# Altium PCB ESP unit.PcbDoc (part 1 of 2)
Units mil, origin at the board's own origin, x right, y up, seen from the top; angles counter-clockwise.
Board outline 2203 x 1101 mil, 2 copper layers (Top Layer, Bottom Layer); 42 components, 65 nets, 171 pads, 86 vias.
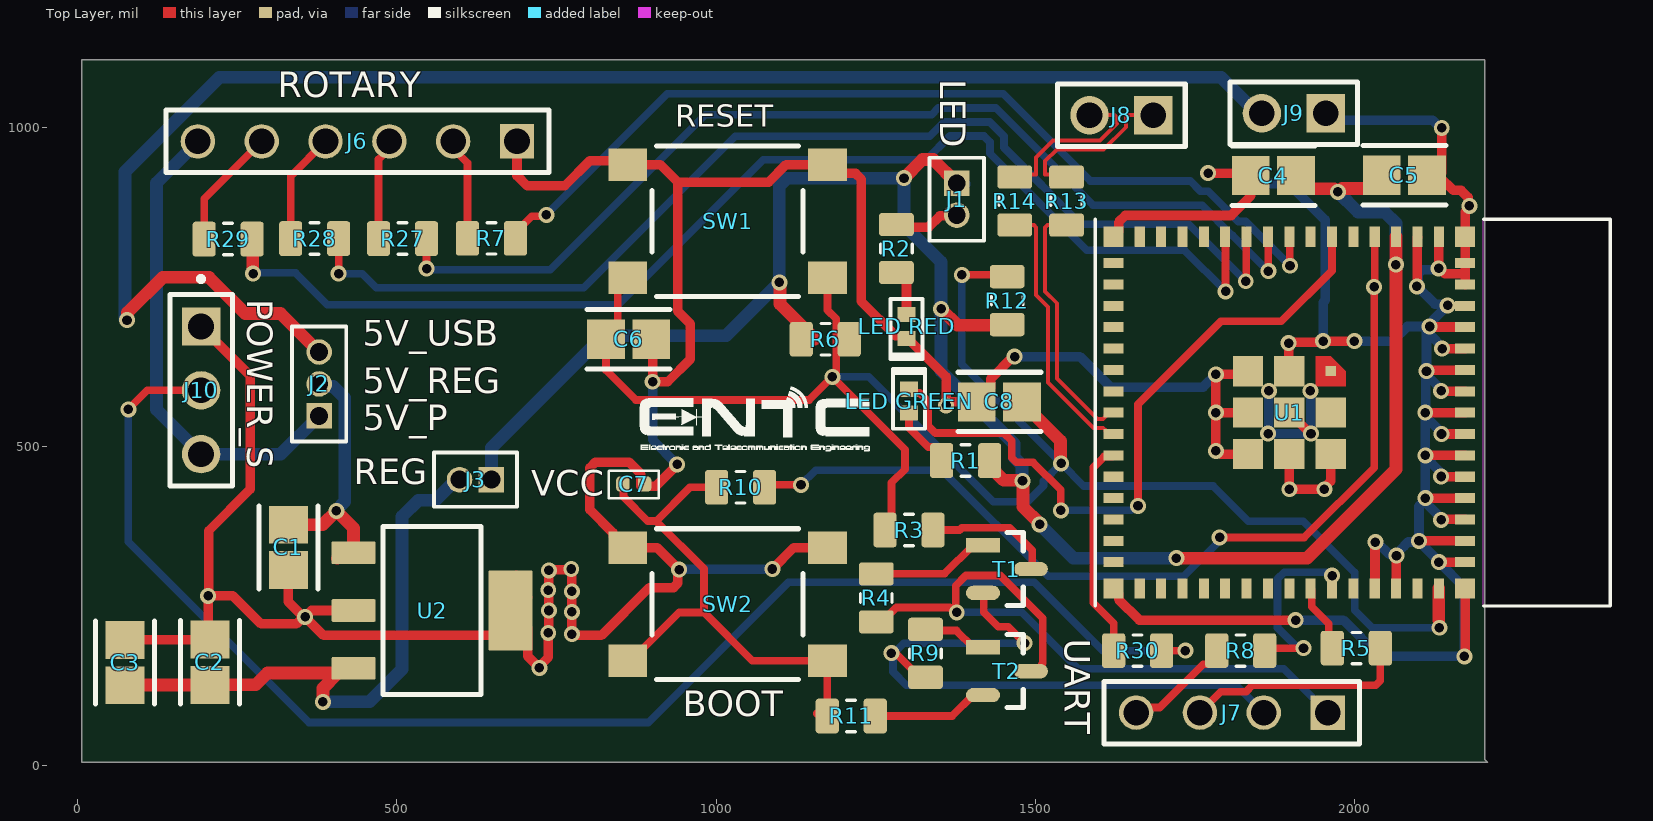
[diagram p0: Top Layer view]
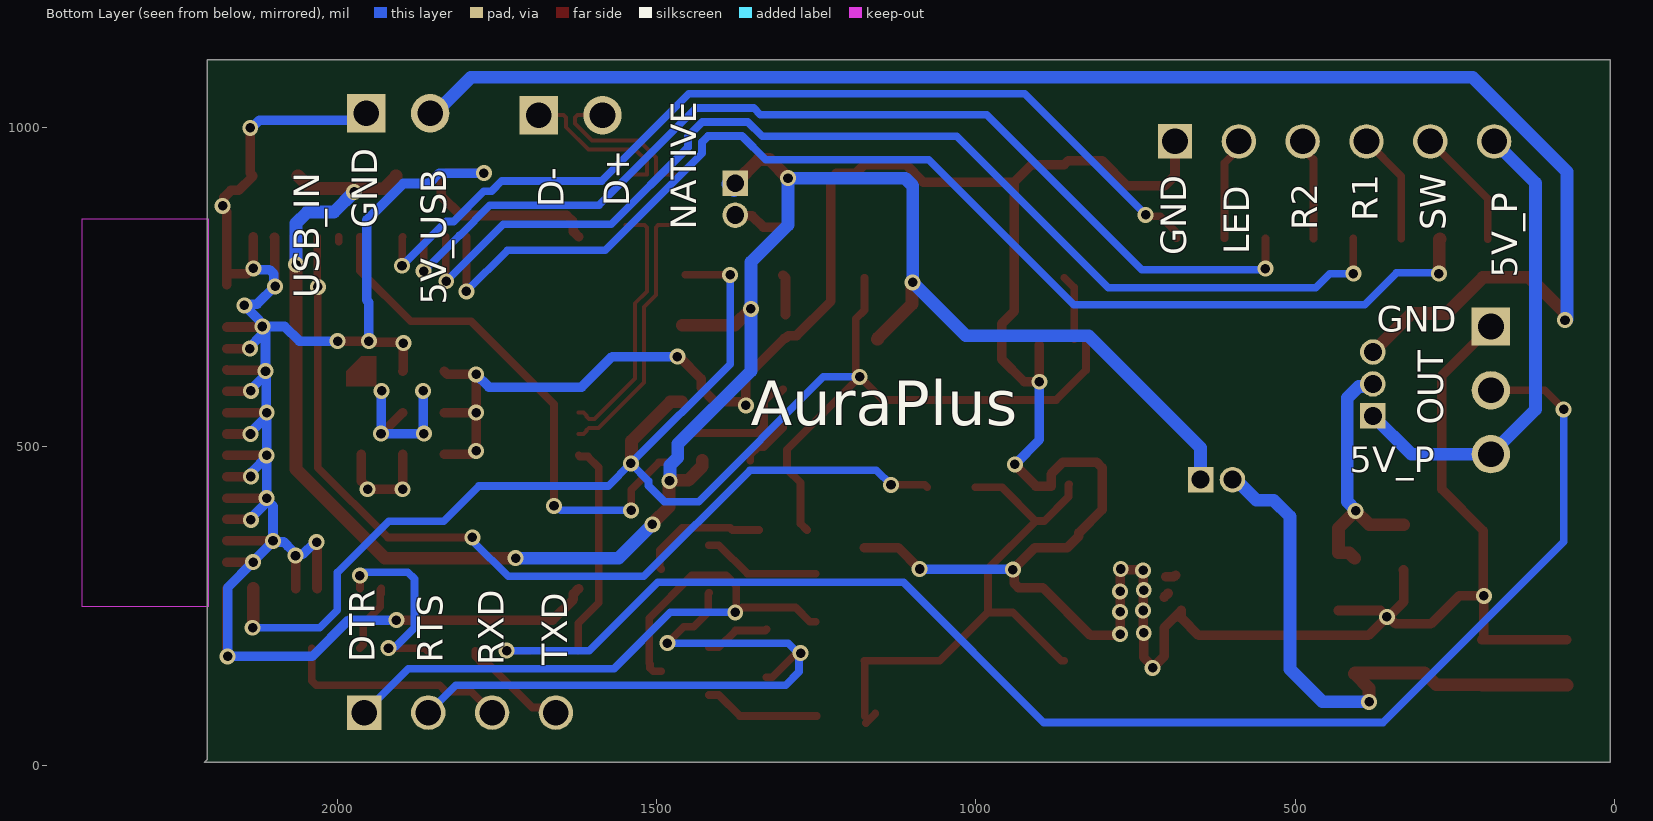
[diagram p1: Bottom Layer view, seen from below]
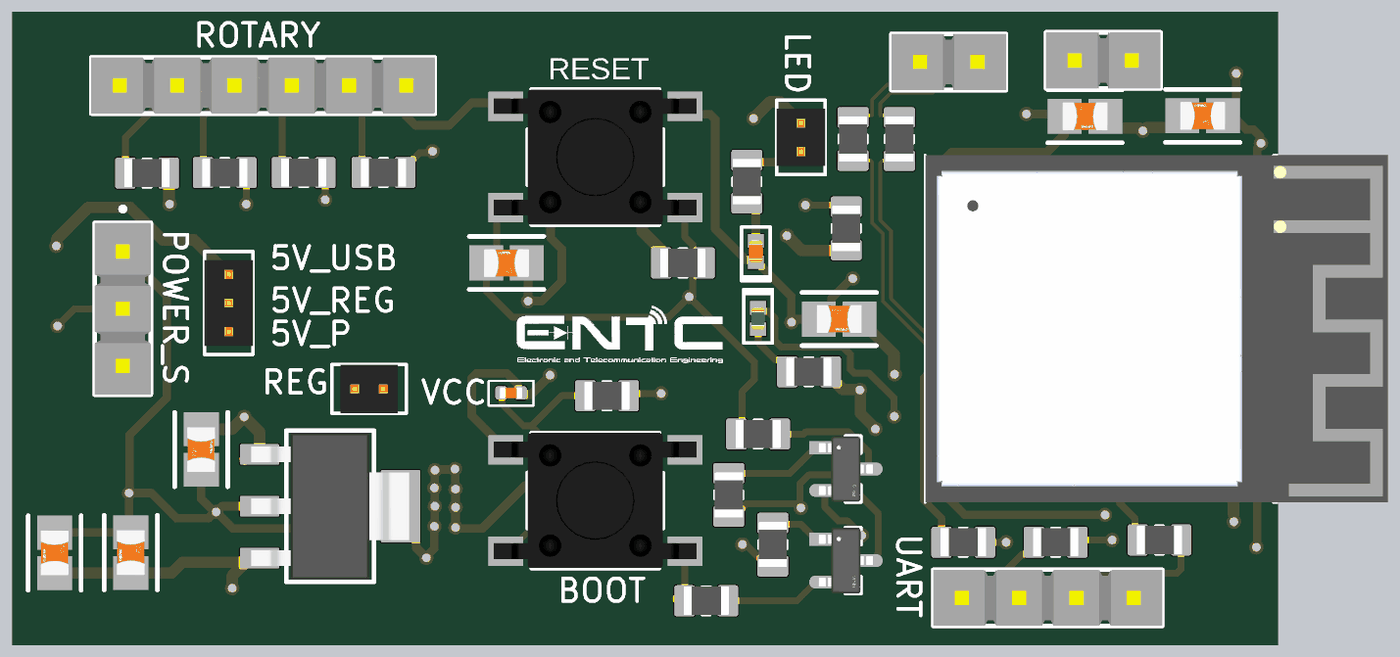
[diagram p2: 3D render of the assembled board from above, using the file's embedded part models]

## Layer stack, top to bottom
Top Solder: solder mask 0.4, Solder Resist, Dk 3.5
Top Layer: signal copper 1.4
Dielectric 1: dielectric 12.6, FR-4, Dk 4.8
Bottom Layer: signal copper 1.4
Bottom Solder: solder mask 0.4, Solder Resist, Dk 3.5

## Board outline
6,5 2209,5 2204,10 2204,1106 6,1106

## Design rules (kind name [scope] priority, off if disabled: settings)
AssemblyTestPointUsage [All] p1: isadvanced=TRUE
AssemblyTestpoint [All] p1: isadvanced=TRUE testpointundercomponent=TRUE minsize=40 maxsize=100 preferedsize=60 minholesize=0 maxholesize=40 preferedholesize=32 testpointgrid=1 usegrid=TRUE gridtolerance=0.01 allowsidetop=TRUE allowsidebottom=TRUE
Clearance "DIFF90 Clearence" [All] p1: isadvanced=TRUE gap=8 ignorepadtopadclearanceinfootprint=FALSE
Clearance Clearance_1 [OnMid vs OnMid] p2: gap=10 ignorepadtopadclearanceinfootprint=FALSE sourcerule=47 cellrowname=All cellrowtype=0 cellcolname=All cellcoltype=0 innerlayers=TRUE
Clearance Clearance_2 [(ExistsOnLayer('Top Layer') Or ExistsOnLayer('Bottom Layer')) vs (ExistsOnLayer('Top Layer') Or ExistsOnLayer('Bottom Layer'))] p3: gap=10 ignorepadtopadclearanceinfootprint=FALSE sourcerule=47 cellrowname=All cellrowtype=0 cellcolname=All cellcoltype=0 outerlayers=TRUE
Clearance [All] p4: gap=10 ignorepadtopadclearanceinfootprint=FALSE ismatrix=TRUE
ComponentClearance [All] p1: isadvanced=TRUE gap=10 collisioncheckmode=3 verticalgap=10 showdistances=FALSE
DiffPairsRouting DIFF90 [All] p1: isadvanced=TRUE maxlimit=8.1 minlimit=8 mostfreqgap=8 toplayer_minwidth=6.03 toplayer_maxwidth=6.23 toplayer_prefwidth=6.03 bottomlayer_minwidth=6.03 bottomlayer_maxwidth=6.23 bottomlayer_prefwidth=6.03 maxuncoupledlength=10
DiffPairsRouting [All] p2: maxlimit=10 minlimit=10 mostfreqgap=10 toplayer_minwidth=15 toplayer_maxwidth=15 toplayer_prefwidth=15 bottomlayer_minwidth=15 bottomlayer_maxwidth=15 bottomlayer_prefwidth=15 maxuncoupledlength=500
FabricationTestPointUsage [All] p1: isadvanced=TRUE valid=0 allowmultiple=FALSE
FabricationTestpoint [All] p1: isadvanced=TRUE side=3 testpointundercomponent=TRUE minsize=40 maxsize=100 preferedsize=60 minholesize=0 maxholesize=40 preferedholesize=32 testpointgrid=1 allowsidetop=TRUE allowsidebottom=TRUE usegrid=TRUE gridtolerance=0.01
FanoutControl Fanout_BGA [IsBGA] p1: isadvanced=TRUE bgadir=Out bgaviamode=Centered fanoutstyle=Auto fanoutdirection=Alternating viagrid=1 // Fanout_BGA (Default Rule)
FanoutControl Fanout_LCC [IsLCC] p2: isadvanced=TRUE bgadir=Out bgaviamode=Centered fanoutstyle=Auto fanoutdirection=Alternating viagrid=1 // Fanout_LCC (Default Rule)
FanoutControl Fanout_SOIC [IsSOIC] p3: isadvanced=TRUE bgadir=Out bgaviamode=Centered fanoutstyle=Auto fanoutdirection=Alternating viagrid=1 // Fanout_SOIC (Default Rule)
FanoutControl Fanout_Small [(CompPinCount < 5)] p4: isadvanced=TRUE bgadir=Out bgaviamode=Centered fanoutstyle=Auto fanoutdirection=OutThenIn viagrid=1 // Fanout_Small (Default Rule)
FanoutControl Fanout_Default [All] p5: isadvanced=TRUE bgadir=Out bgaviamode=Centered fanoutstyle=Auto fanoutdirection=Alternating viagrid=1 // Fanout_Default (Default Rule)
Height [All] p1: isadvanced=TRUE minheight=0 maxheight=1000 prefheight=500
HoleSize [All] p1: isadvanced=TRUE absolutevalues=TRUE maxlimit=100 minlimit=1 maxpercent=80.000 minpercent=20.000
HoleToHoleClearance [All] p1: isadvanced=TRUE gap=10 allowstackedmicrovias=TRUE
LayerPairs [All] p1: isadvanced=TRUE enforce=TRUE
MinimumSolderMaskSliver [All] p1: isadvanced=TRUE minsoldermaskwidth=3.94
NetAntennae [All] p1: isadvanced=TRUE netantennaetolerance=0
PasteMaskExpansion [All] p1: isadvanced=TRUE expansion=0
PlaneClearance [All] p1: isadvanced=TRUE clearance=20
PlaneConnect [All] p1: isadvanced=TRUE planeconnectstyle=Relief reliefexpansion=20 reliefentries=4 reliefconductorwidth=10 reliefairgap=10
PolygonConnect [All] p1: connectstyle=Relief reliefconductorwidth=10 reliefentries=4 polygonreliefangle="90 Angle" airgapwidth=10
RoutingCorners [All] p1: isadvanced=TRUE cornerstyle=45-Degree minsetback=100 maxsetback=100
RoutingPriority [All] p1: isadvanced=TRUE routingpriority=0
RoutingVias [All] p1: isadvanced=TRUE holewidth=12 width=24 viastyle="Through Hole" minholewidth=12 minwidth=24 maxholewidth=12 maxwidth=24
RoutingVias RoutingViaStyle_1 [All] p2: holewidth=10 width=15 viastyle="Through Hole" minholewidth=12 minwidth=20 maxholewidth=2000 maxwidth=3000
ShortCircuit [All] p1: isadvanced=TRUE allowed=FALSE
SilkToSilkClearance [All] p1: isadvanced=TRUE silktosilkclearance=10
SilkToSolderMaskClearance [IsPad] p1: isadvanced=TRUE minsilkscreentomaskgap=6 clearancetoexposedcopper=TRUE
SolderMaskExpansion SolderMaskExpansion_1 [All] p1: isadvanced=TRUE expansion=2 istentingtop=FALSE useseparateexpansions=TRUE expansionbottom=2 istentingbottom=FALSE
SolderMaskExpansion [All] p2: isadvanced=TRUE expansion=4 istentingtop=FALSE
SupplyNets "Schematic Supply Nets_5" [InNet('+VCC_3V3')] p1: isadvanced=TRUE voltage=0.000
SupplyNets "Schematic Supply Nets_4" [InNet('5V_IN')] p2: isadvanced=TRUE voltage=0.000
SupplyNets "Schematic Supply Nets_3" [InNet('3V3_REG')] p3: isadvanced=TRUE voltage=0.000
SupplyNets "Schematic Supply Nets_2" [InNet('GND')] p4: isadvanced=TRUE voltage=0.000
SupplyNets "Schematic Supply Nets_1" [InNet('5V_USB')] p5: isadvanced=TRUE voltage=0.000
SupplyNets "Schematic Supply Nets" [InNet('5V_REG')] p6: isadvanced=TRUE voltage=0.000
UnRoutedNet [All] p1: isadvanced=TRUE
UnpouredPolygon [All] p1: isadvanced=TRUE
Width [All] p1: isadvanced=TRUE maxlimit=100 minlimit=10 preferedwidth=10 minimp=50.000000 maximp=50.000000 favimp=50.000000
Width MaxMinWidth_1 [All] p2: maxlimit=50 minlimit=10 preferedwidth=15 minimp=50.000000 maximp=50.000000 favimp=50.000000
3 further rules are at their usual default settings.

## Classes and differential pairs
differential pair NewDifferentialPair1: +GPIO_P -GPIO_N
differential pair DIFF90: +GPIO_D_P -GPIO_D_N

## Components (designator, comment, footprint, x,y, rotation, side; value= is the part's Value field where it differs from the comment)
C1 "4u7 New" FP-CC0805-0_85-IPC_A 330,342 r90 top value=4.7uF
C2 "10uF New" FP-CC0805-0_85-IPC_A 207,162 r270 top value=10uF
C3 "10uF New" FP-CC0805-0_85-IPC_A 74,161.46 r270 top value=10uF
C4 "10uF New" FP-CC0805-0_85-IPC_A 1873.11,924.26 r0 top value=10uF
C5 "100nF New" FP-CC0805-0_85-IPC_A 2078.46,925 r180 top value=100nF
C6 "1uF New" FP-CC0805-0_85-IPC_A 863,668 r180 top value=1uF
C7 "100nF, 50V" CAPC1005X55N 870.93,441 r180 top
C8 "1uF New" FP-CC0805-0_85-IPC_A 1443.91,569.93 r0 top value=1uF
J1 "FTS-102-01-F-S" "2 PIN CONNECTOR JUMPER" 1377.02,912.45 r0 top
J2 "FTS-103-01-F-S" "3 PIN CONNECTOR JUMPER - DUPLICATE" 378,548 r180 top
J3 "FTS-102-01-F-S" "2 PIN CONNECTOR JUMPER" 648,448 r270 top
J6 "6 Pin Connector" SAMTEC_HTSW-106-07-G-S 438,978 r0 top
J7 "4 Pin Connector" SAMTEC_HTSW-104-07-G-S 1808,83 r0 top
J8 "2 Pin Connector" SAMTEC_HTSW-102-07-G-S 1635,1019 r0 top
J9 "2 Pin Connector" SAMTEC_HTSW-102-07-G-S 1905,1022 r0 top
J10 "3 Pin Connector" SAMTEC_HTSW-103-XX-X-S 193,588 r90 top
"LED GREEN" "GREEN" "LED 0402G" 1302.21,570.91 r270 top
"LED RED" "RED" "LED 0402R" 1298.28,688.04 r90 top
R1 "1K New" RESC2012X60N 1390.99,478 r0 top value=1kR
R2 "1K New" RESC2012X60N 1282.53,810.09 r90 top value=1kR
R3 "0 Ohm New" RESC2012X60N 1302.21,369.14 r180 top value=0R
R4 "10K New" RESC2012X60N 1251.03,262.84 r90 top value=10kR
R5 "0 Ohm New" RESC2012X60N 2003,184.1 r0 top value=0R
R6 "10K New" RESC2012X60N 1170.99,668 r180 top value=10kR
R7 "0 Ohm New" RESC2012X60N 648,826 r0 top value=0R
R8 "0 Ohm New" RESC2012X60N 1821.9,180.17 r180 top value=0R
R9 "10K New" RESC2012X60N 1328,175.99 r90 top value=10kR
R10 "27 ohms New" RESC2012X60N 1038.43,436.07 r0 top value=27R
R11 "0 Ohm New" RESC2012X60N 1211.66,77.8 r180 top value=0R
R12 "10K New" RESC2012X60N 1456,728.4 r270 top value=10kR
R13 "0 Ohm New" RESC2012X60N 1549,884.4 r270 top value=0R
R14 "0 Ohm New" RESC2012X60N 1468,884.6 r270 top value=0R
R27 "0 Ohm New" RESC2012X60N 508.71,825.83 r0 top value=0R
R28 "0 Ohm New" RESC2012X60N 370.91,825.83 r0 top value=0R
R29 "0 Ohm New" RESC2012X60N 235.41,825 r0 top value=0R
R30 "0 Ohm New" RESC2012X60N 1660.48,180.17 r0 top value=0R
SW1 "PTS645SH50SMTR92 LFS" FP-PTS645SH50SMTR92LFS-MFG 1018,853 r180 top
SW2 "PTS645SH50SMTR92 LFS" FP-PTS645SH50SMTR92LFS-MFG 1018,253 r180 top
T1 "SS8050-G" FP-SS8050-G-IPC_B 1455.58,308 r0 top
T2 "SS8050-G" FP-SS8050-G-IPC_B 1455.58,148 r0 top
U1 "ESP32-S3-MINI-1-N8" XCVR_ESP32-S3-MINI-1-N8 1898,553 r270 top
U2 "TL1963A-33DCYR" DCY0004A_N 555,243 r0 top

## Footprints (in the part's own frame and the unit in brackets; to place one, negate y for a bottom-side part, rotate by r counter-clockwise, add the part's x,y. Pads: shape width x height; smd on the part's side, far side on the other; paste and mask are expansions set on the pad)
"2 PIN CONNECTOR JUMPER" [mil]
  rect 40x40 hole 28: 1(0,0)
  round 40 hole 28: 2(0,-50)
  silkscreen extent -42,-90 42,40, body extent -42,-75 42,25, height 154
"3 PIN CONNECTOR JUMPER - DUPLICATE" [mil]
  rect 40x40 hole 28: 1(0,0)
  round 40 hole 28: 2(0,-50) 3(0,-100)
  silkscreen extent -43,-140 43,40, body extent -42,-125 43,25, height 154
CAPC1005X55N [mm]
  rrect53% 0.54x0.6 smd: 1(-0.43,0) 2(0.43,0)
  silkscreen extent -0.99,-0.53 0.99,0.56, body extent -0.5,-0.25 0.5,0.25, height 0.55
DCY0004A_N [mm] "SOT223, 4-Leads, Body 6.7x3.7mm, Pitch 2.3mm, IPC Medium Density"
  rrect11% 1.75x0.9 smd: 1(-3.125,2.3) 2(-3.125,0) 3(-3.125,-2.3)
  rrect6% 1.75x3.2 smd: 4(3.125,0)
  silkscreen extent -1.95,-3.35 1.95,3.35, body extent -3.5,-3.25 3.5,3.25, height 1.62
FP-CC0805-0_85-IPC_A [mil]
  rect 59.24x61.27 smd paste+0 mask+0: 1(-35.46,0) 2(35.46,0)
  silkscreen extent -65,-46 65,46, body extent -85,-50 85,50, height 10
FP-PTS645SH50SMTR92LFS-MFG [mm]
  rect 1.55x1.3 smd paste+0 mask+0: 1(-3.975,2.25) 2(3.975,2.25) 3(-3.975,-2.25) 4(3.975,-2.25)
  silkscreen extent -3,-3 3,3, body extent -4.5,-3 4.5,3, height 4.3
FP-SS8050-G-IPC_B [mm]
  rect 1.357x0.572 smd paste+0 mask+0: 1(-0.951,0.95)
  rrect100% 1.357x0.572 smd paste+0 mask+0: 2(-0.951,-0.95) 3(0.951,0)
  silkscreen extent 0,-1.45 0.65,1.45, body extent -1.88,-1.7 1.88,1.7, height 0.25
"LED 0402G" [mm]
  rect 0.6x0.7 smd: 1(-0.475,0) 2(0.475,0)
  silkscreen extent -1.3,-0.64 1.09,0.64, body extent -0.5,-0.3 0.5,0.3, height 0.2
"LED 0402R" [mm]
  rect 0.6x0.7 smd: 1(-0.475,0) 2(0.475,0)
  silkscreen extent -1.3,-0.64 1.09,0.64, body extent -0.5,-0.3 0.5,0.3, height 0.2
RESC2012X60N [mm]
  rrect25% 0.92x1.38 smd: 1(-0.955,0) 2(0.955,0)
  silkscreen extent -0.18,-0.63 0.18,0.63, body extent -1,-0.63 1,0.63, height 0.3
SAMTEC_HTSW-102-07-G-S [mm]
  rect 1.53x1.53 hole 1.02: 1(1.27,0)
  round 1.53 hole 1.02: 2(-1.27,0)
  silkscreen extent -2.54,-1.24 2.54,1.24, body extent -2.54,-1.24 2.54,1.24, height 8.38
SAMTEC_HTSW-103-XX-X-S [mm]
  rect 1.53x1.53 / inner round 1.53 / far side rect 1.53x1.53 hole 1.02: 1(2.54,0)
  round 1.53 hole 1.02: 2(0,0) 3(-2.54,0)
  silkscreen extent -3.81,-1.24 4.53,1.24, body extent -3.81,-1.24 3.81,1.24, height 8.38
SAMTEC_HTSW-104-07-G-S [mm]
  rect 1.37x1.37 / inner round 1.37 / far side rect 1.37x1.37 hole 1.02: 1(3.81,0)
  round 1.37 hole 1.02: 2(1.27,0) 3(-1.27,0) 4(-3.81,0)
  silkscreen extent -5.08,-1.24 5.08,1.24, body extent -5.08,-1.24 5.08,1.24, height 8.38
SAMTEC_HTSW-106-07-G-S [mm]
  rect 1.37x1.37 / inner round 1.37 / far side rect 1.37x1.37 hole 1.02: 1(6.35,0)
  round 1.37 hole 1.02: 2(3.81,0) 3(1.27,0) 4(-1.27,0) 5(-3.81,0) 6(-6.35,0)
  silkscreen extent -7.62,-1.24 7.62,1.24, body extent -7.62,-1.24 7.62,1.24, height 8.38
XCVR_ESP32-S3-MINI-1-N8 [mm]
  rect 0.8x0.4 smd: 1(-7,5.95) 2(-7,5.1) 3(-7,4.25) 4(-7,3.4) 5(-7,2.55) 6(-7,1.7) 7(-7,0.85) 8(-7,0) 9(-7,-0.85) 10(-7,-1.7) 11(-7,-2.55) 12(-7,-3.4) 13(-7,-4.25) 14(-7,-5.1) 15(-7,-5.95) 31(7,-5.95) 32(7,-5.1) 33(7,-4.25) 34(7,-3.4) 35(7,-2.55) 36(7,-1.7) 37(7,-0.85) 38(7,0) 39(7,0.85) 40(7,1.7) 41(7,2.55) 42(7,3.4) 43(7,4.25) 44(7,5.1) 45(7,5.95)
  rect 0.4x0.8 smd: 16(-5.95,-7) 17(-5.1,-7) 18(-4.25,-7) 19(-3.4,-7) 20(-2.55,-7) 21(-1.7,-7) 22(-0.85,-7) 23(0,-7) 24(0.85,-7) 25(1.7,-7) 26(2.55,-7) 27(3.4,-7) 28(4.25,-7) 29(5.1,-7) 30(5.95,-7) 46(5.95,7) 47(5.1,7) 48(4.25,7) 49(3.4,7) 50(2.55,7) 51(1.7,7) 52(0.85,7) 53(0,7) 54(-0.85,7) 55(-1.7,7) 56(-2.55,7) 57(-3.4,7) 58(-4.25,7) 59(-5.1,7) 60(-5.95,7)
  rect 1.2x1.2 smd: 61(0,0) 67(0,1.65) 68(1.65,1.65) 69(-1.65,0) 70(1.65,0) 71(-1.65,-1.65) 72(0,-1.65) 73(1.65,-1.65)
  rect 0.8x0.8 smd: 62(-7,7) 63(-7,-7) 64(7,-7) 65(7,7)
  rect 0.4x0.4 smd paste-1 mask+0: 66(-1.65,1.65)
  Top Layer region: -1.05,1.05 -2.25,1.05 -2.25,1.65 -1.65,2.25 -1.05,2.25
  Keep-Out Layer region: 7.7,7.725 -7.7,7.725 -7.7,12.775 7.7,12.775
  Keep-Out Layer region: 7.7,7.725 -7.7,7.725 -7.7,12.775 7.7,12.775
  silkscreen extent -7.7,-7.73 7.7,12.78, body extent -7.7,-7.71 7.7,12.79, height 2.55

## Part data
C1: library part CC0805KKX5R8BB475, "Ceramic Capacitor, Multilayer, Ceramic, 25V, 10% +Tol, 10% -Tol, X5R, 15% TC, 4.7uF, Surface Mount, 0805", Capacitor Type=Ceramic, Case/Package=0805, LCSC Part Number=C132173, Manufacturer=Yageo, Max Operating Temperature=85°C, Min Operating Temperature=-55°C, Package Shape=Rectangular, Package Style=SMTMeter, Rated DC Voltage (URdc)=25V, Supplier Part Number=311-1871-1-ND, Temperature Characteristics Code=X5R, Tolerance  (fill in as +-)=10%, Category="Ceramic Capacitors", ComponentLink1Description=https://datasheet.ciiva.com:443/pdfs/VipMasterIC/IC/YAGO/YAGO-S-A0006851646/YAGO-S-A0006851646-1.pdf?src-supplier=IHS+Markit, ComponentLink1URL=https://datasheet.ciiva.com:443/pdfs/VipMasterIC/IC/YAGO/YAGO-S-A0006851646/YAGO-S-A0006851646-1.pdf?src-supplier=IHS+Markit, ComponentLink2Description=http://www.mouser.com/ds/2/447/UPY-GPHC_X5R_4V-to-50V_25-1131599.pdf?src-supplier=Mouser, ComponentLink2URL=http://www.mouser.com/ds/2/447/UPY-GPHC_X5R_4V-to-50V_25-1131599.pdf?src-supplier=Mouser, ComponentLink3Description=http://www.yageo.com/documents/recent/UPY-GPHC_X5R_4V-to-50V_25.pdf?src-supplier=Digikey, ComponentLink3URL=http://www.yageo.com/documents/recent/UPY-GPHC_X5R_4V-to-50V_25.pdf?src-supplier=Digikey, ComponentLink4Description=https://www.yageo.com/upload/media/product/productsearch/datasheet/mlcc/UPY-GPHC_X5R_4V-to-50V_25.pdf?src-supplier=Digikey, ComponentLink4URL=https://www.yageo.com/upload/media/product/productsearch/datasheet/mlcc/UPY-GPHC_X5R_4V-to-50V_25.pdf?src-supplier=Digikey, Dielectric Material=Ceramic, Height=1.25mm, JESD-609 Code=e3, Length=2mm, Manufacturer Part Number=CC0805KKX5R8BB475, Mounting Technology="Surface Mount", Multilayer=Yes, Packaging="Tape and Reel", Pins=2, Pricing="1=0.38, 10=0.224, 100=0.1475, 1000=0.10755 (USD)", Reach SVHC Compliant=Yes, RoHS=Yes, RoHS Compliant=Yes, Stock=117794, Supplier=Digikey, Terminal Finish=Nickel, Termination=Wraparound, Tolerance (fill in as +-)=10%, Width=1.25mm
C2 C3 C4: library part CC0805ZKY5V6BB106, "Ceramic Capacitor, Multilayer, Ceramic, 10V, 80% +Tol, 20% -Tol, Y5V, -82/+22% TC, 10uF, Surface Mount, 0805", Capacitor Type=Ceramic, Case/Package=0805, LCSC Part Number=C88484, Manufacturer=Yageo, Max Operating Temperature=85°C, Min Operating Temperature=-30°C, Package Shape=Rectangular, Package Style=SMTMeter, Rated DC Voltage (URdc)=10V, Supplier Part Number=311-1355-1-ND, Temperature Characteristics Code=Y5V, Tolerance  (fill in as +-)=20%, Tolerance (fill in as +-)=80%, Category="Ceramic Capacitors", ComponentLink1Description=https://datasheet.ciiva.com:443/pdfs/VipMasterIC/IC/YAGO/YAGO-S-A0004841839/YAGO-S-A0004841839-1.pdf?src-supplier=IHS+Markit, ComponentLink1URL=https://datasheet.ciiva.com:443/pdfs/VipMasterIC/IC/YAGO/YAGO-S-A0004841839/YAGO-S-A0004841839-1.pdf?src-supplier=IHS+Markit, ComponentLink2Description=https://datasheet.ciiva.com/28450/1132289-28450847.pdf?src-supplier=Element14, ComponentLink2URL=https://datasheet.ciiva.com/28450/1132289-28450847.pdf?src-supplier=Element14, ComponentLink3Description=https://datasheet.ciiva.com/156/mlccorderingcode-156385.pdf?src-supplier=Digikey, ComponentLink3URL=https://datasheet.ciiva.com/156/mlccorderingcode-156385.pdf?src-supplier=Digikey, ComponentLink4Description=https://datasheet.ciiva.com/156/mlccorderingcode-156384.pdf?src-supplier=Digikey, ComponentLink4URL=https://datasheet.ciiva.com/156/mlccorderingcode-156384.pdf?src-supplier=Digikey, ComponentLink5Description=https://datasheet.ciiva.com/156/mlccorderingcode-156386.pdf?src-supplier=Digikey, ComponentLink5URL=https://datasheet.ciiva.com/156/mlccorderingcode-156386.pdf?src-supplier=Digikey, ComponentLink6Description=https://datasheet.ciiva.com/11465/upy-gphc-y5v-6-3v-to-50v-5-11465832.pdf?src-supplier=Avnet, ComponentLink6URL=https://datasheet.ciiva.com/11465/upy-gphc-y5v-6-3v-to-50v-5-11465832.pdf?src-supplier=Avnet, Dielectric Material=Ceramic, Height=1.25mm, JESD-609 Code=e3, Length=2mm, Manufacturer Part Number=CC0805ZKY5V6BB106, Mounting Technology="Surface Mount", Multilayer=Yes, Packaging="Tape and Reel", Pins=2, Pricing="1=0.15, 10=0.087, 100=0.0532, 1000=0.03594 (USD)", Reach SVHC Compliant=Yes, RoHS=Yes, RoHS Compliant=Yes, Stock=85682, Supplier=Digikey, Terminal Finish=Nickel, Termination=Wraparound, Width=1.25mm
C5: library part CC0805KRX7R9BB104, "Ceramic Capacitor, Multilayer, Ceramic, 50V, 10% +Tol, 10% -Tol, X7R, 15% TC, 0.1uF, Surface Mount, 0805", Capacitor Type=Ceramic, Case/Package=0805, LCSC Part Number=C49678, Manufacturer=Yageo, Max Operating Temperature=125°C, Min Operating Temperature=-55°C, Package Shape=Rectangular, Package Style=SMTMeter, Rated DC Voltage (URdc)=50V, Supplier Part Number=311-1140-1-ND, Temperature Characteristics Code=X7R, Tolerance  (fill in as +-)=10%, Category="Ceramic Capacitors", ComponentLink1Description=https://datasheet.ciiva.com:443/pdfs/VipMasterIC/IC/YAGO/YAGO-S-A0003557223/YAGO-S-A0003557223-1.pdf?src-supplier=IHS+Markit, ComponentLink1URL=https://datasheet.ciiva.com:443/pdfs/VipMasterIC/IC/YAGO/YAGO-S-A0003557223/YAGO-S-A0003557223-1.pdf?src-supplier=IHS+Markit, ComponentLink2Description=https://datasheet.ciiva.com/11786/0900766b80d84f1d-11786009.pdf?src-supplier=Rs, ComponentLink2URL=https://datasheet.ciiva.com/11786/0900766b80d84f1d-11786009.pdf?src-supplier=Rs, ComponentLink3Description=https://datasheet.ciiva.com/11464/upy-gphc-x7r-6-3v-to-50v-8-11464757.pdf?src-supplier=Avnet, ComponentLink3URL=https://datasheet.ciiva.com/11464/upy-gphc-x7r-6-3v-to-50v-8-11464757.pdf?src-supplier=Avnet, Dielectric Material=Ceramic, Height=0.85mm, JESD-609 Code=e3, Length=2mm, Manufacturer Part Number=CC0805KRX7R9BB104, Mounting Technology="Surface Mount", Multilayer=Yes, Packaging="Tape and Reel", Pins=2, Pricing="1=0.08, 10=0.027, 100=0.0192, 1000=0.0136 (USD)", Reach SVHC Compliant=Yes, RoHS=Yes, RoHS Compliant=Yes, Stock=2396272, Supplier=Digikey, Terminal Finish=Nickel, Termination=Wraparound, Tolerance (fill in as +-)=10%, Width=1.25mm
C6 C8: library part CC0805KKX7R7BB105, "Ceramic Capacitor, Multilayer, Ceramic, 16V, 10% +Tol, 10% -Tol, X7R, 15% TC, 1uF, Surface Mount, 0805", Capacitor Type=Ceramic, Case/Package=0805, LCSC Part Number=C94122, Manufacturer=Yageo, Max Operating Temperature=125°C, Min Operating Temperature=-55°C, Package Shape=Rectangular, Package Style=SMTMeter, Rated DC Voltage (URdc)=16V, Supplier Part Number=311-1365-1-ND, Temperature Characteristics Code=X7R, Tolerance  (fill in as +-)=10%, Category="Ceramic Capacitors", ComponentLink1Description=https://datasheet.ciiva.com:443/pdfs/VipMasterIC/IC/YAGO/YAGO-S-A0003557223/YAGO-S-A0003557223-1.pdf?src-supplier=IHS+Markit, ComponentLink1URL=https://datasheet.ciiva.com:443/pdfs/VipMasterIC/IC/YAGO/YAGO-S-A0003557223/YAGO-S-A0003557223-1.pdf?src-supplier=IHS+Markit, ComponentLink2Description=https://datasheet.ciiva.com/13173/upy-gp-np0-16v-to-50v-8-3714-13173254.pdf?src-supplier=Mouser, ComponentLink2URL=https://datasheet.ciiva.com/13173/upy-gp-np0-16v-to-50v-8-3714-13173254.pdf?src-supplier=Mouser, ComponentLink3Description=https://datasheet.ciiva.com/28450/1489800-28450750.pdf?src-supplier=Element14, ComponentLink3URL=https://datasheet.ciiva.com/28450/1489800-28450750.pdf?src-supplier=Element14, ComponentLink4Description=https://datasheet.ciiva.com/7978/1489800-7978201.pdf?src-supplier=Element14, ComponentLink4URL=https://datasheet.ciiva.com/7978/1489800-7978201.pdf?src-supplier=Element14, ComponentLink5Description=https://datasheet.ciiva.com/144/mlccorderingcode-144902.pdf?src-supplier=Digikey, ComponentLink5URL=https://datasheet.ciiva.com/144/mlccorderingcode-144902.pdf?src-supplier=Digikey, ComponentLink6Description=https://datasheet.ciiva.com/144/mlccorderingcode-144903.pdf?src-supplier=Digikey, ComponentLink6URL=https://datasheet.ciiva.com/144/mlccorderingcode-144903.pdf?src-supplier=Digikey, ComponentLink7Description=https://datasheet.ciiva.com/144/mlccorderingcode-144904.pdf?src-supplier=Digikey, ComponentLink7URL=https://datasheet.ciiva.com/144/mlccorderingcode-144904.pdf?src-supplier=Digikey, ComponentLink8Description=https://datasheet.ciiva.com/11464/upy-gphc-x7r-6-3v-to-50v-8-11464750.pdf?src-supplier=Avnet, ComponentLink8URL=https://datasheet.ciiva.com/11464/upy-gphc-x7r-6-3v-to-50v-8-11464750.pdf?src-supplier=Avnet, ComponentLink9Description=https://datasheet.ciiva.com/15189/getdatasheetpartid-251802-15189206.pdf?src-supplier=Verical, ComponentLink9URL=https://datasheet.ciiva.com/15189/getdatasheetpartid-251802-15189206.pdf?src-supplier=Verical, Dielectric Material=Ceramic, Height=1.25mm, JESD-609 Code=e3, Length=2mm, Manufacturer Part Number=CC0805KKX7R7BB105, Mounting Technology="Surface Mount", Multilayer=Yes, Packaging="Tape and Reel", Pins=2, Pricing="1=0.13, 10=0.072, 100=0.0434, 1000=0.02889 (USD)", Reach SVHC Compliant=Yes, RoHS=Yes, RoHS Compliant=Yes, Stock=1105590, Supplier=Digikey, Terminal Finish=Nickel, Termination=Wraparound, Tolerance (fill in as +-)=10%, Width=1.25mm
C7: library part CL05B104KB54PNC, "CAP CER 0.1UF 50V X7R 0402", Capacitor Type=Ceramic, LCSC Part Number=C307331, Manufacturer=Samsung, Supplier Part Number=1276-CL05B104KB54PNCCT-ND, Category="Ceramic Capacitors", ComponentLink1Description=https://datasheet.ciiva.com:443/pdfs/VipMasterIC/IC/SEMS/SEMS-S-A0006318249/SEMS-S-A0006320959-1.pdf?src-supplier=IHS+Markit, ComponentLink1URL=https://datasheet.ciiva.com:443/pdfs/VipMasterIC/IC/SEMS/SEMS-S-A0006318249/SEMS-S-A0006320959-1.pdf?src-supplier=IHS+Markit, Dielectric Material=Ceramic, Manufacturer Part Number=CL05B104KB54PNC, Pins=2, Pricing="1=0.1, 10=0.037, 100=0.0211, 1000=0.01333, 2500=0.01141, 5000=0.01026 (USD)", Reach SVHC Compliant=Yes, RoHS=Yes, RoHS Compliant=Yes, Stock=1836220, Supplier=Digikey
J1 J3: "CONN HEADER VERT 2POS 1.27MM", Flammability Rating="UL94 V-0", LCSC Part Number=C6045317, Manufacturer=Samtec, Manufacturer Series=FTS, Supplier Part Number=SAM15176-ND, Additional Feature="Low Profile", Category=Connectors, ComponentLink1Description=https://datasheet.ciiva.com:443/pdfs/VipMasterIC/IC/SAMI/SAMI-S-A0001504673/SAMI-S-A0001504673-1.pdf?src-supplier=IHS+Markit, ComponentLink1URL=https://datasheet.ciiva.com:443/pdfs/VipMasterIC/IC/SAMI/SAMI-S-A0001504673/SAMI-S-A0001504673-1.pdf?src-supplier=IHS+Markit, ComponentLink2Description=http://www.samtec.com/documents/webfiles/pdf/FTS.pdf?src-supplier=Avnet, ComponentLink2URL=http://www.samtec.com/documents/webfiles/pdf/FTS.pdf?src-supplier=Avnet, ComponentLink3Description=https://datasheet.octopart.com/FTS-102-01-F-S-Samtec-datasheet-118493358.pdf?src-supplier=Electro+Sonic, ComponentLink3URL=https://datasheet.octopart.com/FTS-102-01-F-S-Samtec-datasheet-118493358.pdf?src-supplier=Electro+Sonic, Connector Type="BOARD CONNECTOR", Contact Finish - Mating="GOLD (3) OVER NICKEL (50)", Contact Finish - Termination="Matte Tin (Sn) - with Nickel (Ni) barrier", Contact Gender=Male, Contact Material=Bronze, DIN Conformance=No, Filter Feature=No, IEC Conformance=No, JESD-609 Code=e3, Manufacturer Part Number=FTS-102-01-F-S, MIL Conformance=No, Mixed Contacts=No, Mounting Style=STRAIGHT, Mounting Technology=Board, Number of Contacts=2, Number of Rows Loaded=1, Option="General Purpose", Pricing="1=0.49, 50=0.4252, 100=0.3608, 500=0.2994, 1000=0.25609, 2000=0.252 (USD)", Reach SVHC Compliant=Yes, RoHS=Yes, RoHS Compliant=Yes, Stock=165, Supplier=Digikey, Terminal Pitch=1.27mm, Termination=Solder
J2: "CONN HEADER VERT 3POS 1.27MM", Flammability Rating="UL94 V-0", LCSC Part Number=C3333578, Manufacturer=Samtec, Manufacturer Series=FTS, Supplier Part Number=612-FTS-103-01-F-S-ND, Additional Feature="Low Profile", Category=Connectors, ComponentLink1Description=https://datasheet.ciiva.com:443/pdfs/VipMasterIC/IC/SAMI/SAMI-S-A0001504673/SAMI-S-A0001504673-1.pdf?src-supplier=IHS+Markit, ComponentLink1URL=https://datasheet.ciiva.com:443/pdfs/VipMasterIC/IC/SAMI/SAMI-S-A0001504673/SAMI-S-A0001504673-1.pdf?src-supplier=IHS+Markit, ComponentLink2Description=http://suddendocs.samtec.com/prints/fts-1xx-xx-xx-xx-xx-mkt.pdf?src-supplier=Digikey, ComponentLink2URL=http://suddendocs.samtec.com/prints/fts-1xx-xx-xx-xx-xx-mkt.pdf?src-supplier=Digikey, ComponentLink3Description=http://www.samtec.com/documents/webfiles/pdf/FTS.pdf?src-supplier=Avnet, ComponentLink3URL=http://www.samtec.com/documents/webfiles/pdf/FTS.pdf?src-supplier=Avnet, ComponentLink4Description=https://datasheet.octopart.com/FTS-103-01-F-S-Samtec-datasheet-116535195.pdf?src-supplier=Toby+Electronics, ComponentLink4URL=https://datasheet.octopart.com/FTS-103-01-F-S-Samtec-datasheet-116535195.pdf?src-supplier=Toby+Electronics, ComponentLink5Description=https://datasheet.octopart.com/FTS-103-01-F-S-Samtec-datasheet-151470456.pdf?src-supplier=Sager+Electronics, ComponentLink5URL=https://datasheet.octopart.com/FTS-103-01-F-S-Samtec-datasheet-151470456.pdf?src-supplier=Sager+Electronics, ComponentLink6Description=https://datasheet.octopart.com/FTS-103-01-F-S-Samtec-datasheet-118493358.pdf?src-supplier=Electro+Sonic, ComponentLink6URL=https://datasheet.octopart.com/FTS-103-01-F-S-Samtec-datasheet-118493358.pdf?src-supplier=Electro+Sonic, Connector Type="BOARD CONNECTOR", Contact Finish - Mating="GOLD (3) OVER NICKEL (50)", Contact Finish - Termination="Matte Tin (Sn) - with Nickel (Ni) barrier", Contact Gender=Male, Contact Material=Bronze, DIN Conformance=No, Filter Feature=No, IEC Conformance=No, JESD-609 Code=e3, Manufacturer Part Number=FTS-103-01-F-S, MIL Conformance=No, Mixed Contacts=No, Mounting Style=STRAIGHT, Mounting Technology=Board, Number of Contacts=3, Number of Rows Loaded=1, Option="General Purpose", Pricing="1=0.73, 50=0.6378, 100=0.5407, 500=0.4491, 1000=0.38362, 2000=0.31431, 5000=0.2478, 10000=0.228 (USD)", Reach SVHC Compliant=Yes, RoHS=Yes, RoHS Compliant=Yes, Stock=1344, Supplier=Digikey, Terminal Pitch=1.27mm, Termination=Solder
J6: library part HTSW-106-07-G-S, "Gold Straight Policy 2.54mm 6P 5.84mm -55℃~+125℃ 2.54mm 2.54mm Single Row Phosphor Bronze Plugin,P=2.54mm Pin Headers ROHS", Insulation Color=Natural, LCSC Part Number=C3334125, Manufacturer=Samtec, Max Operating Temperature=125°C, Min Operating Temperature=-55°C, Supplier Part Number=SAM10539-ND, Additional Feature=E.L.P., Body Breadth=0.198inch, Body Depth=0.1inch, Body Length=1.2inch, Body/Shell Style=RECEPTACLE, Category="Headers and Wire Housings", ComponentLink1Description=https://datasheet.ciiva.com:443/pdfs/VipMasterIC/IC/SAMI/SAMIS19675/SAMIS19675-1.pdf?src-supplier=IHS+Markit, ComponentLink1URL=https://datasheet.ciiva.com:443/pdfs/VipMasterIC/IC/SAMI/SAMIS19675/SAMIS19675-1.pdf?src-supplier=IHS+Markit, ComponentLink2Description=https://datasheet.ciiva.com/739/htsw-xxx-xx-xxx-x-xx-xx-xx-mkt-739146.pdf?src-supplier=Digikey, ComponentLink2URL=https://datasheet.ciiva.com/739/htsw-xxx-xx-xxx-x-xx-xx-xx-mkt-739146.pdf?src-supplier=Digikey, ComponentLink3Description=https://datasheet.ciiva.com/10206/htsw-th-10206975.pdf?src-supplier=Avnet, ComponentLink3URL=https://datasheet.ciiva.com/10206/htsw-th-10206975.pdf?src-supplier=Avnet, Connector Type="BOARD CONNECTOR", Contact Finish - Mating="GOLD (10) OVER NICKEL (50)", Contact Finish - Termination="Gold (Au) - with Nickel (Ni) barrier", Contact Gender=Male, Contact Material=Bronze, Contact Pattern=RECTANGULAR, Contact Style="SQ PIN-SKT", DIN Conformance=No, Filter Feature=No, IEC Conformance=No, Insulation Material=Polymer, JESD-609 Code=e4, Manufacturer Part Number=HTSW-106-07-G-S, Mating Contact Pitch=0.1inch, Mating Information="MULTIPLE MATING PARTS AVAILABLE", MIL Conformance=No, Mixed Contacts=No, Mounting Style=STRAIGHT, Mounting Technology=Board, Number Of Connectors=1, Number of Contacts=6, Number Of PCB Rows=1, Number of Rows Loaded=1, Option="General Purpose", PCB Contact Pattern=RECTANGULAR, Plating Thickness=10uin, Pricing="1=0.34, 10=0.292, 100=0.2478, 500=0.2212, 1000=0.21062, 5000=0.188, 10000=0.17903 (USD)", Reach SVHC Compliant=Yes, Reference Standard=UL, Reliability=COMMERCIAL, RoHS=Yes, RoHS Compliant=Yes, Stock=708, Supplier=Digikey, Terminal Pitch=2.54mm, Termination=Solder
J7: library part HTSW-104-07-G-S, "Board Connector, 4 Contact(s), 1 Row(s), Male, Straight, 0.1 inch Pitch, Solder Terminal, Black Insulator, Receptacle", Dielectric Withstanding Voltage (AC)=675V, Insulation Color=Black, Insulation Resistance=5GR, LCSC Part Number=C3335226, Manufacturer=Samtec, Max Operating Temperature=125°C, Min Operating Temperature=-55°C, Rated Current (Signal)=7A, Supplier Part Number=SAM9526-ND, Additional Feature=E.L.P., Body Breadth=0.1inch, Body Depth=0.1inch, Body Length=0.4inch, Body/Shell Style=RECEPTACLE, Category="Headers and Wire Housings", ComponentLink1Description=https://datasheet.ciiva.com:443/pdfs/VipMasterIC/IC/SAMI/SAMI-S-A0001505016/SAMI-S-A0001505016-1.pdf?src-supplier=IHS+Markit, ComponentLink1URL=https://datasheet.ciiva.com:443/pdfs/VipMasterIC/IC/SAMI/SAMI-S-A0001505016/SAMI-S-A0001505016-1.pdf?src-supplier=IHS+Markit, ComponentLink2Description=https://datasheet.ciiva.com/10176/htsw-th-10176526.pdf?src-supplier=Avnet, ComponentLink2URL=https://datasheet.ciiva.com/10176/htsw-th-10176526.pdf?src-supplier=Avnet, Connector Type="BOARD CONNECTOR", Contact Finish - Mating="GOLD (10) OVER NICKEL (50)", Contact Finish - Termination="Gold (Au) - with Nickel (Ni) barrier", Contact Gender=Male, Contact Material=Bronze, Contact Pattern=RECTANGULAR, Contact Style="SQ PIN-SKT", DIN Conformance=No, Durability=100Cycles, Filter Feature=No, IEC Conformance=No, Insulation Material=Glass, JESD-609 Code=e4, Manufacturer Part Number=HTSW-104-07-G-S, Mating Contact Pitch=0.1inch, Mating Information="MULTIPLE MATING PARTS AVAILABLE", MIL Conformance=No, Mixed Contacts=No, Mounting Style=STRAIGHT, Mounting Technology=Board, Number Of Connectors=1, Number of Contacts=4, Number Of PCB Rows=1, Number of Rows Loaded=1, Option="General Purpose", PCB Contact Pattern=RECTANGULAR, Plating Thickness=10uin, Pricing="1=0.25, 10=0.214, 100=0.182, 500=0.16246, 1000=0.1547, 5000=0.13808, 10000=0.13149 (USD)", Reach SVHC Compliant=Yes, Reference Standard=UL, Reliability=COMMERCIAL, RoHS=Yes, RoHS Compliant=Yes, Stock=1294, Supplier=Digikey, Terminal Length=0.1inch, Terminal Pitch=2.54mm, Termination=Solder
J8 J9: library part HTSW-102-07-G-S, "Board Connector, 2 Contact(s), 1 Row(s), Male, Straight, 0.1 inch Pitch, Solder Terminal", LCSC Part Number=C6423785, Manufacturer=Samtec, Supplier Part Number=SAM8736-ND, Additional Feature=E.L.P., Category=Connectors, ComponentLink1Description=https://datasheet.ciiva.com:443/pdfs/VipMasterIC/IC/SAMI/SAMI-S-A0003531373/SAMI-S-A0003531373-1.pdf?src-supplier=IHS+Markit, ComponentLink1URL=https://datasheet.ciiva.com:443/pdfs/VipMasterIC/IC/SAMI/SAMI-S-A0003531373/SAMI-S-A0003531373-1.pdf?src-supplier=IHS+Markit, ComponentLink2Description=https://datasheet.ciiva.com/29130/tsw-th-29130729.pdf?src-supplier=Digikey, ComponentLink2URL=https://datasheet.ciiva.com/29130/tsw-th-29130729.pdf?src-supplier=Digikey, ComponentLink3Description=https://datasheet.ciiva.com/737/htsw-xxx-xx-xxx-x-xx-xx-xx-mkt-737890.pdf?src-supplier=Digikey, ComponentLink3URL=https://datasheet.ciiva.com/737/htsw-xxx-xx-xxx-x-xx-xx-xx-mkt-737890.pdf?src-supplier=Digikey, ComponentLink4Description=https://datasheet.ciiva.com/10279/htsw-th-10279799.pdf?src-supplier=Avnet, ComponentLink4URL=https://datasheet.ciiva.com/10279/htsw-th-10279799.pdf?src-supplier=Avnet, Connector Type="BOARD CONNECTOR", Contact Finish - Mating="GOLD (10) OVER NICKEL (50)", Contact Finish - Termination="Matte Tin (Sn) - with Nickel (Ni) barrier", Contact Gender=Male, Contact Material=Bronze, DIN Conformance=No, Filter Feature=No, IEC Conformance=No, JESD-609 Code=e3, Manufacturer Part Number=HTSW-102-07-G-S, Mating Information="MULTIPLE MATING PARTS AVAILABLE", MIL Conformance=No, Mixed Contacts=No, Mounting Style=STRAIGHT, Mounting Technology=Board, Number of Contacts=2, Number of Rows Loaded=1, Option="General Purpose", Pricing="1=0.11, 10=0.093, 100=0.0788, 500=0.0703, 1000=0.06694, 5000=0.05975, 10000=0.05689 (USD)", Reach SVHC Compliant=Yes, RoHS=Yes, RoHS Compliant=Yes, Stock=844, Supplier=Digikey, Terminal Pitch=2.54mm, Termination=Solder
J10: library part HTSW-103-07-G-S, "Board Connector, 3 Contact(s), 1 Row(s), Male, Straight, 0.1 inch Pitch, Solder Terminal, Natural Insulator, Receptacle", Dielectric Withstanding Voltage (AC)=500V, Insulation Color=Natural, LCSC Part Number=C5714562, Manufacturer=Samtec, Max Operating Temperature=125°C, Min Operating Temperature=-55°C, Rated Current (Signal)=7A, Supplier Part Number=SAM8814-ND, Additional Feature=E.L.P., Body Breadth=0.098inch, Body Depth=0.1inch, Body Length=0.3inch, Body/Shell Style=RECEPTACLE, Category=Connectors, ComponentLink1Description=https://datasheet.ciiva.com:443/pdfs/VipMasterIC/IC/SAMI/SAMI-S-A0001505016/SAMI-S-A0001505016-1.pdf?src-supplier=IHS+Markit, ComponentLink1URL=https://datasheet.ciiva.com:443/pdfs/VipMasterIC/IC/SAMI/SAMI-S-A0001505016/SAMI-S-A0001505016-1.pdf?src-supplier=IHS+Markit, ComponentLink2Description=https://datasheet.ciiva.com/737/htsw-xxx-xx-xxx-x-xx-xx-xx-mkt-737886.pdf?src-supplier=Digikey, ComponentLink2URL=https://datasheet.ciiva.com/737/htsw-xxx-xx-xxx-x-xx-xx-xx-mkt-737886.pdf?src-supplier=Digikey, Connector Type="BOARD CONNECTOR", Contact Finish - Mating="GOLD (10) OVER NICKEL (50)", Contact Finish - Termination="Gold (Au) - with Nickel (Ni) barrier", Contact Gender=Male, Contact Material=Bronze, Contact Pattern=RECTANGULAR, Contact Style="SQ PIN-SKT", DIN Conformance=No, Filter Feature=No, IEC Conformance=No, Insulation Material=Polymer, JESD-609 Code=e4, Manufacturer Part Number=HTSW-103-07-G-S, Mating Contact Pitch=0.1inch, Mating Information="MULTIPLE MATING PARTS AVAILABLE", MIL Conformance=No, Mixed Contacts=No, Mounting Style=STRAIGHT, Mounting Technology=Board, Number Of Connectors=1, Number of Contacts=3, Number Of PCB Rows=1, Number of Rows Loaded=1, Option="General Purpose", PCB Contact Pattern=RECTANGULAR, Plating Thickness=10uin, Pricing="1=0.18, 10=0.155, 100=0.1314, 500=0.11726, 1000=0.11165, 5000=0.09966, 10000=0.0949 (USD)", Reach SVHC Compliant=Yes, Reference Standard=UL, Reliability=COMMERCIAL, RoHS=Yes, RoHS Compliant=Yes, Stock=9138, Supplier=Digikey, Terminal Length=0.1inch, Terminal Pitch=2.54mm, Termination=Solder
"LED GREEN": library part VLMG1500-GS08, "LED YLW-GRN 0402 SMD", Color=Green,Yellow, Color@wavelength=Green, Forward Current=30mA, Forward Voltage=2.4V, LCSC Part Number=C511404, Manufacturer=Vishay, Max Operating Temperature=85°C, Min Operating Temperature=-30°C, Reverse Voltage-Max=5V, Supplier Part Number=VLMG1500-GS08CT-ND, Category=LEDs, Channels=1, ComponentLink1Description=https://datasheet.ciiva.com:443/pdfs/VipMasterIC/IC/VISH/VISH-S-A0003457490/VISH-S-A0003457490-1.pdf?src-supplier=IHS+Markit, ComponentLink1URL=https://datasheet.ciiva.com:443/pdfs/VipMasterIC/IC/VISH/VISH-S-A0003457490/VISH-S-A0003457490-1.pdf?src-supplier=IHS+Markit, ComponentLink2Description=https://datasheet.ciiva.com/12071/vlmo1500-244705-12071911.pdf?src-supplier=Mouser, ComponentLink2URL=https://datasheet.ciiva.com/12071/vlmo1500-244705-12071911.pdf?src-supplier=Mouser, ComponentLink3Description=https://datasheet.ciiva.com/30005/vlmo1500-30005134.pdf?src-supplier=Avnet, ComponentLink3URL=https://datasheet.ciiva.com/30005/vlmo1500-30005134.pdf?src-supplier=Avnet, Luminous Intensity-Nom=90mcd, Manufacturer Part Number=VLMG1500-GS08, Mounting Technology="Surface Mount", Optoelectronic Device Type="SINGLE COLOR LED", Overall Height=0.35mm, Packaging="Tape and Reel", Pins=2, Pricing="1=0.24, 10=0.164, 100=0.1147, 500=0.09218, 1000=0.0847 (USD)", Reach SVHC Compliant=Yes, RoHS=Yes, RoHS Compliant=Yes, Shape=Rectangular, Size=0.5mm, Stock=150677, Supplier=Digikey, Terminal Pitch=0.95mm, Viewing Angle=130°
"LED RED": library part VLMS1500-GS08, "LED RED 0402 SMD", Color=Red, Forward Current=30mA, Forward Voltage=2.4V, LCSC Part Number=C511370, Manufacturer=Vishay, Max Operating Temperature=85°C, Min Operating Temperature=-30°C, Reverse Voltage-Max=5V, Supplier Part Number=VLMS1500-GS08CT-ND, Category=LEDs, Channels=1, Color@wavelength=Red, ComponentLink1Description=https://datasheet.ciiva.com:443/pdfs/VipMasterIC/IC/VISH/VISH-S-A0003457490/VISH-S-A0003457490-1.pdf?src-supplier=IHS+Markit, ComponentLink1URL=https://datasheet.ciiva.com:443/pdfs/VipMasterIC/IC/VISH/VISH-S-A0003457490/VISH-S-A0003457490-1.pdf?src-supplier=IHS+Markit, ComponentLink2Description=http://www.farnell.com/datasheets/1809983.pdf?src-supplier=Farnell, ComponentLink2URL=http://www.farnell.com/datasheets/1809983.pdf?src-supplier=Farnell, ComponentLink3Description=http://www.mouser.com/ds/2/427/vlmo1500-244705.pdf?src-supplier=Mouser, ComponentLink3URL=http://www.mouser.com/ds/2/427/vlmo1500-244705.pdf?src-supplier=Mouser, ComponentLink4Description=http://www.alliedelec.com/m/d/cfc385e1097fc985ee9a50a3551ac188.pdf?src-supplier=Allied+Electronics, ComponentLink4URL=http://www.alliedelec.com/m/d/cfc385e1097fc985ee9a50a3551ac188.pdf?src-supplier=Allied+Electronics, ComponentLink5Description=https://datasheet.octopart.com/VLMS1500-GS08-Vishay-datasheet-62332426.pdf?src-supplier=Newark, ComponentLink5URL=https://datasheet.octopart.com/VLMS1500-GS08-Vishay-datasheet-62332426.pdf?src-supplier=Newark, ComponentLink6Description=https://datasheet.octopart.com/VLMS1500-GS08-Vishay-datasheet-33014519.pdf?src-supplier=Element14, ComponentLink6URL=https://datasheet.octopart.com/VLMS1500-GS08-Vishay-datasheet-33014519.pdf?src-supplier=Element14, ComponentLink7Description=http://datasheet.octopart.com/VLMS1500-GS08-Vishay-datasheet-21227148.pdf?src-supplier=Avnet, ComponentLink7URL=http://datasheet.octopart.com/VLMS1500-GS08-Vishay-datasheet-21227148.pdf?src-supplier=Avnet, ComponentLink8Description=http://www.farnell.com/datasheets/1809983.pdf?src-supplier=Newark, ComponentLink8URL=http://www.farnell.com/datasheets/1809983.pdf?src-supplier=Newark, ComponentLink9Description=http://www.farnell.com/datasheets/2050839.pdf?src-supplier=Newark, ComponentLink9URL=http://www.farnell.com/datasheets/2050839.pdf?src-supplier=Newark, ComponentLink10Description=https://datasheet.octopart.com/VLMS1500-GS08-Vishay-datasheet-21227148.pdf?src-supplier=Future+Electronics, ComponentLink10URL=https://datasheet.octopart.com/VLMS1500-GS08-Vishay-datasheet-21227148.pdf?src-supplier=Future+Electronics, ComponentLink11Description=http://datasheet.octopart.com/VLMS1500-GS08-Vishay-datasheet-21227148.pdf?src-supplier=Quest, ComponentLink11URL=http://datasheet.octopart.com/VLMS1500-GS08-Vishay-datasheet-21227148.pdf?src-supplier=Quest, ComponentLink12Description=http://datasheet.octopart.com/VLMS1500-GS08-Vishay-datasheet-21227148.pdf?src-supplier=NAC+Semi, ComponentLink12URL=http://datasheet.octopart.com/VLMS1500-GS08-Vishay-datasheet-21227148.pdf?src-supplier=NAC+Semi, Luminous Intensity-Nom=54mcd, Manufacturer Part Number=VLMS1500-GS08, Mounting Technology="Surface Mount", Optoelectronic Device Type="SINGLE COLOR LED", Overall Height=0.35mm, Packaging="Tape and Reel", Pins=2, Pricing="1=0.24, 10=0.164, 100=0.1147, 500=0.09218, 1000=0.0847 (USD)", Reach SVHC Compliant=Yes, RoHS=Yes, RoHS Compliant=Yes, Shape=Rectangular, Size=0.5mm, Stock=73400, Supplier=Digikey, Terminal Pitch=0.95mm, Viewing Angle=130°
R1 R2: library part RC0805FR-071KL, "Fixed Resistor, Metal Glaze/thick Film, 0.125W, 1000ohm, 150V, 1% +/-Tol, 100ppm/Cel, Surface Mount, 0805", Case/Package=0805, LCSC Part Number=C95781, Manufacturer=Yageo, Max Operating Temperature=155°C, Min Operating Temperature=-55°C, Package Height=0.5mm, Package Length=2mm, Package Shape=Rectangular, Package Width=1.25mm, Power=125mW, Rated Temperature=70°C, Resistor Type="FIXED RESISTOR", Supplier Part Number=311-1.00KCRCT-ND, Temperature Coefficient (ppm/Cel)=100, Tolerance=1%, Working Voltage=150V, Additional Feature="LASER TRIMMABLE", Category="Chip SMD Resistors", ComponentLink1Description=https://datasheet.ciiva.com:443/pdfs/VipMasterIC/IC/YAGO/YAGO-S-A0008145938/YAGO-S-A0008145938-1.pdf?src-supplier=IHS+Markit, ComponentLink1URL=https://datasheet.ciiva.com:443/pdfs/VipMasterIC/IC/YAGO/YAGO-S-A0008145938/YAGO-S-A0008145938-1.pdf?src-supplier=IHS+Markit, ComponentLink2Description=https://datasheet.ciiva.com/7941/1686128-7941719.pdf?src-supplier=Element14, ComponentLink2URL=https://datasheet.ciiva.com/7941/1686128-7941719.pdf?src-supplier=Element14, ComponentLink3Description=https://datasheet.ciiva.com/46385/444164-46385020.pdf?src-supplier=Element14, ComponentLink3URL=https://datasheet.ciiva.com/46385/444164-46385020.pdf?src-supplier=Element14, ComponentLink4Description=https://datasheet.ciiva.com/2456/pyu-r-int-thick-7-2456976.pdf?src-supplier=Digikey, ComponentLink4URL=https://datasheet.ciiva.com/2456/pyu-r-int-thick-7-2456976.pdf?src-supplier=Digikey, ComponentLink5Description=https://datasheet.ciiva.com/2456/pyu-r-int-thick-7-2456977.pdf?src-supplier=Digikey, ComponentLink5URL=https://datasheet.ciiva.com/2456/pyu-r-int-thick-7-2456977.pdf?src-supplier=Digikey, ComponentLink6Description=https://datasheet.ciiva.com/2456/pyu-r-int-thick-7-2456975.pdf?src-supplier=Digikey, ComponentLink6URL=https://datasheet.ciiva.com/2456/pyu-r-int-thick-7-2456975.pdf?src-supplier=Digikey, ComponentLink7Description=https://datasheet.ciiva.com/16850/rc0805-16850409.pdf?src-supplier=Future+Electronics, ComponentLink7URL=https://datasheet.ciiva.com/16850/rc0805-16850409.pdf?src-supplier=Future+Electronics, Construction=Chip, JESD-609 Code=e3, Manufacturer Part Number=RC0805FR-071KL, Mounting Technology="Surface Mount", Packaging="Tape and Reel", Pins=2, Pricing="1=0.1, 10=0.012, 100=0.0112, 1000=0.00714 (USD)", Reach SVHC Compliant=Yes, RoHS=Yes, RoHS Compliant=Yes, Stock=424548, Supplier=Digikey, Technology="METAL GLAZE/THICK FILM", Terminal Finish=Nickel, Termination=Wraparound
R3 R5 R7 R8 R11 R13 R14 R27 R28 R29 R30: library part RC0805JR-070RL, "125mW Thick Film Resistors 150V ±5% 0Ω 0805 Chip Resistor - Surface Mount ROHS", Case/Package=0805, LCSC Part Number=C96345, Manufacturer=Yageo, Max Operating Temperature=155°C, Min Operating Temperature=-55°C, Package Height=0.5mm, Package Length=2mm, Package Shape=Rectangular, Package Width=1.25mm, Power=125mW, Rated Temperature=70°C, Resistor Type="FIXED RESISTOR", Supplier Part Number=311-0.0ARCT-ND, Category="Chip SMD Resistors", ComponentLink1Description=https://datasheet.ciiva.com:443/pdfs/VipMasterIC/IC/YAGO/YAGO-S-A0008145938/YAGO-S-A0008145938-1.pdf?src-supplier=IHS+Markit, ComponentLink1URL=https://datasheet.ciiva.com:443/pdfs/VipMasterIC/IC/YAGO/YAGO-S-A0008145938/YAGO-S-A0008145938-1.pdf?src-supplier=IHS+Markit, ComponentLink2Description=https://datasheet.ciiva.com/11819/0900766b8106beab-11819430.pdf?src-supplier=Rs, ComponentLink2URL=https://datasheet.ciiva.com/11819/0900766b8106beab-11819430.pdf?src-supplier=Rs, ComponentLink3Description=https://datasheet.ciiva.com/7941/1738694-7941861.pdf?src-supplier=Element14, ComponentLink3URL=https://datasheet.ciiva.com/7941/1738694-7941861.pdf?src-supplier=Element14, ComponentLink4Description=https://datasheet.ciiva.com/7941/1738694-7941862.pdf?src-supplier=Element14, ComponentLink4URL=https://datasheet.ciiva.com/7941/1738694-7941862.pdf?src-supplier=Element14, ComponentLink5Description=https://datasheet.ciiva.com/7941/1738694-7941863.pdf?src-supplier=Element14, ComponentLink5URL=https://datasheet.ciiva.com/7941/1738694-7941863.pdf?src-supplier=Element14, ComponentLink6Description=https://datasheet.ciiva.com/15190/getdatasheetpartid-330685-15190028.pdf?src-supplier=Verical, ComponentLink6URL=https://datasheet.ciiva.com/15190/getdatasheetpartid-330685-15190028.pdf?src-supplier=Verical, Construction=Chip, JESD-609 Code=e3, Manufacturer Part Number=RC0805JR-070RL, Mounting Technology="Surface Mount", Packaging="Tape and Reel", Pins=2, Pricing="1=0.1, 10=0.015, 25=0.0128, 50=0.011, 100=0.0097, 250=0.00812, 500=0.00716, 1000=0.00633 (USD)", Reach SVHC Compliant=Yes, RoHS=Yes, RoHS Compliant=Yes, Stock=634565, Supplier=Digikey, Technology="METAL GLAZE/THICK FILM", Terminal Finish=Nickel, Termination=Wraparound
R4 R6 R9 R12: library part RE0805FRE0710KL, "Fixed Resistor, Metal Glaze/thick Film, 0.125W, 10000ohm, 150V, 1% +/-Tol, 50ppm/Cel, Surface Mount, 0805", Case/Package=0805, LCSC Part Number=C859543, Manufacturer=Yageo, Max Operating Temperature=155°C, Min Operating Temperature=-55°C, Package Height=0.5mm, Package Length=2mm, Package Width=1.25mm, Power=125mW, Rated Temperature=70°C, Resistor Type="FIXED RESISTOR", Supplier Part Number=13-RE0805FRE0710KLCT-ND, Temperature Coefficient (ppm/Cel)=50, Tolerance=1%, Working Voltage=150V, Category="Chip SMD Resistors", ComponentLink1Description=https://datasheet.ciiva.com:443/pdfs/VipMasterIC/IC/YAGO/YAGO-S-A0003975721/YAGO-S-A0003975721-1.pdf?src-supplier=IHS+Markit, ComponentLink1URL=https://datasheet.ciiva.com:443/pdfs/VipMasterIC/IC/YAGO/YAGO-S-A0003975721/YAGO-S-A0003975721-1.pdf?src-supplier=IHS+Markit, ComponentLink2Description=http://www.yageo.com/NewPortal/yageodocoutput?fileName=/pdf/R-Chip/PYu-RE_105_RoHS_L_4.pdf&src-supplier=Digikey, ComponentLink2URL=http://www.yageo.com/NewPortal/yageodocoutput?fileName=/pdf/R-Chip/PYu-RE_105_RoHS_L_4.pdf&src-supplier=Digikey, Construction=Rectangular, JESD-609 Code=e3, Manufacturer Part Number=RE0805FRE0710KL, Mounting Technology="Surface Mount", Packaging="Tape and Reel", Pins=2, Pricing="1=0.1, 10=0.014, 100=0.0133, 1000=0.0102, 2500=0.00794 (USD)", Reach SVHC Compliant=Yes, RoHS=Yes, RoHS Compliant=Yes, Stock=16051, Supplier=Digikey, Technology="METAL GLAZE/THICK FILM", Terminal Finish=Nickel, Termination=Wraparound
R10: library part RC0805FR-0727RL, "Fixed Resistor, Metal Glaze/thick Film, 0.125W, 27ohm, 150V, 1% +/-Tol, 100ppm/Cel, Surface Mount, 0805", Case/Package=0805, LCSC Part Number=C163408, Manufacturer=Yageo, Max Operating Temperature=155°C, Min Operating Temperature=-55°C, Package Height=0.5mm, Package Length=2mm, Package Shape=Rectangular, Package Width=1.25mm, Power=125mW, Rated Temperature=70°C, Resistor Type="FIXED RESISTOR", Supplier Part Number=311-27.0CRCT-ND, Temperature Coefficient (ppm/Cel)=100, Tolerance=1%, Working Voltage=150V, Additional Feature="LASER TRIMMABLE", Category="Chip SMD Resistors", ComponentLink1Description=https://datasheet.ciiva.com:443/pdfs/VipMasterIC/IC/YAGO/YAGO-S-A0008145938/YAGO-S-A0008145938-1.pdf?src-supplier=IHS+Markit, ComponentLink1URL=https://datasheet.ciiva.com:443/pdfs/VipMasterIC/IC/YAGO/YAGO-S-A0008145938/YAGO-S-A0008145938-1.pdf?src-supplier=IHS+Markit, ComponentLink2Description=https://datasheet.ciiva.com/12561/rc0805-257173-12561222.pdf?src-supplier=Mouser, ComponentLink2URL=https://datasheet.ciiva.com/12561/rc0805-257173-12561222.pdf?src-supplier=Mouser, Construction=Chip, JESD-609 Code=e3, Manufacturer Part Number=RC0805FR-0727RL, Mounting Technology="Surface Mount", Packaging="Tape and Reel", Pins=2, Pricing="1=0.1, 10=0.012, 100=0.0102, 1000=0.00714, 2500=0.00686 (USD)", Reach SVHC Compliant=Yes, RoHS=Yes, RoHS Compliant=Yes, Stock=197665, Supplier=Digikey, Technology="METAL GLAZE/THICK FILM", Terminal Finish=Nickel, Termination=Wraparound